# EAGLE board 5mmtermCuringCircuitOld (EAGLE 9.4.1)

Size 90.15 x 74.6 mm. Coordinates in mm from the lower left corner, seen from the top.
Outline: 0,0 90.15,0 90.15,74.6 0,74.6 0,0
Copper layers (1*16): Top 0.0178mm / dielectric 59mil / Bottom 0.0178mm
Design rules "epl-lpkf": minimum track width 8mil, minimum drill 0.35mm, track to track 8mil, track to pad 8mil, pad to pad 8mil, via to via 8mil, smd to smd 8mil, copper to edge 15mil, drill to drill 15mil, minimum pad ring 8mil, minimum via ring 8mil, stop-mask expansion 3mil, vias tented up to drill 0mil, thermal gap 10mil
Net classes: 0 default: width 0.508 mm, drill 1.199 mm, clearance 0.381 mm; 1 thick: width 1.27 mm, drill 1.199 mm, clearance 0.381 mm; 2 high current: width 4.318 mm, drill 1.199 mm, clearance 0.381 mm

## Footprints (pad centres in the part's own frame; a part is rotated, then mirrored left to right if it is on the bottom)
SPC4077 = drill 0.8 pad 2.184 long: 1 -3,0; 2 0,-4.8 | drill 1 pad 2.184 long: 3 3,0
C0805 = smd 1.3 x 1.5: 1 -0.95,0; 2 0.95,0
E1,8-4 = drill 0.711 pad 1.168: + -0.889,0 | drill 0.711 pad 1.168 octagon: - 0.889,0
SCREWTERMINAL-5MM-2 = drill 1.3 pad 2.032 square: 1 0,0 | drill 1.3 pad 2.032: 2 5,0
TO220H = drill 1.118 long: 1 -2.54,-10.16; 2 0,-10.16; 3 2.54,-10.16 | hole 3.302: 0,4.826
DIL16 = drill 0.813 long: 1 -8.89,-3.81; 2 -6.35,-3.81; 3 -3.81,-3.81; 4 -1.27,-3.81; 5 1.27,-3.81; 6 3.81,-3.81; 7 6.35,-3.81; 8 8.89,-3.81; 9 8.89,3.81; 10 6.35,3.81; 11 3.81,3.81; 12 1.27,3.81; 13 -1.27,3.81; 14 -3.81,3.81; 15 -6.35,3.81; 16 -8.89,3.81
1X08-BIG = drill 1.016 pad 1.778 octagon: 1 -8.89,0; 2 -6.35,0; 3 -3.81,0; 4 -1.27,0; 5 1.27,0; 6 3.81,0; 7 6.35,0; 8 8.89,0
R0805 = smd 1.3 x 1.5: 1 -0.95,0; 2 0.95,0
SCREWTERMINAL-5MM-3 = drill 1.3 pad 2.413 square: 1 0,0 | drill 1.3 pad 2.413: 2 5,0; 3 10,0
1X05 = drill 1.016 pad 1.88: 1 0,0; 2 2.54,0; 3 5.08,0; 4 7.62,0; 5 10.16,0
TRANS_RFP30N06LE = drill 1.32 square: 1 -2.54,0 | drill 1.32: 2 0,0; 3 2.54,0
1X16 = drill 1.016 pad 1.88: 1 0,0; 2 2.54,0; 3 5.08,0; 4 7.62,0; 5 10.16,0; 6 12.7,0; 7 15.24,0; 8 17.78,0; 9 20.32,0; 10 22.86,0; 11 25.4,0; 12 27.94,0; 13 30.48,0; 14 33.02,0; 15 35.56,0; 16 38.1,0

## Placement (x,y rotation side)
12V_BARREL  [SPC4077]  11.43,7.62 0 top
C1  0.1uF  [C0805]  63.5,17.78 0 top
C2  10uF  [E1,8-4]  71.12,45.72 0 top
C3  10uF  [E1,8-4]  63.5,45.72 180 top
DM_SWITCH  [SCREWTERMINAL-5MM-2]  73.66,68.58 180 top
FAN  [SCREWTERMINAL-5MM-2]  83.82,59.69 90 top
HEATER  [SCREWTERMINAL-5MM-2]  83.82,43.18 90 top
IC1  7805T  [TO220H]  52.07,22.86 180 top
IC2  L293D  [DIL16]  52.07,49.53 270 top
LIGHTS  [SPC4077]  78.74,8.89 180 top
MCP9808  [1X08-BIG]  29.21,7.62 0 top
MOTOR_A  [SCREWTERMINAL-5MM-2]  43.18,68.58 180 top
MOTOR_B  [SCREWTERMINAL-5MM-2]  58.42,68.58 180 top
POWER_SWITCH  [SCREWTERMINAL-5MM-2]  48.26,7.62 0 top
R1  10K  [R0805]  72.39,27.94 180 top
R2  10K  [R0805]  63.5,27.94 0 top
R3  220  [R0805]  72.39,38.1 0 top
R4  220  [R0805]  63.5,38.1 0 top
RELAY-A  [SCREWTERMINAL-5MM-3]  83.82,21.59 90 top
RELAY_B  [SCREWTERMINAL-5MM-2]  62.23,7.62 0 top
ROTARY_ENC  [1X05]  6.35,69.85 0 top
SPEAKER  [SCREWTERMINAL-5MM-2]  27.94,68.58 180 top
T1  RFP30N06LE  [TRANS_RFP30N06LE]  71.12,55.88 90 top
T2  RFP30N06LE  [TRANS_RFP30N06LE]  63.5,55.88 90 top
TFT_SCREEN  [1X16]  7.62,22.86 90 top

## Library data of the parts
12V_BARREL LIGHTS = con-jack; OC_FARNELL: unknown; OC_NEWARK: unknown
C1 = rcl
C2 C3 = rcl; SPICEPREFIX: C
DM_SWITCH FAN HEATER MOTOR_A MOTOR_B POWER_SWITCH RELAY_B SPEAKER = SparkFun-Connectors; SF_SKU: PRT-08432
IC1 = linear
IC2 = st-microelectronics; MPN: L293D; OC_FARNELL: 9589619; OC_NEWARK: 56P8249
MCP9808 = adafruit
R1-R4 = rcl; SPICEPREFIX: R
RELAY-A = SparkFun-Connectors; PROD_ID: CONN-10134; SF_SKU: PRT-08433
ROTARY_ENC TFT_SCREEN = SparkFun-Connectors
T1 T2 = RFP30N06LE; AVAILABILITY: Unavailable; MF: ON Semiconductor; MP: RFP30N06LE; PACKAGE: TO-220 Intersil; PRICE: None

## Nets
12V [thick]: C2.+ IC1.1 POWER_SWITCH.2 RELAY_B.2
GND: 12V_BARREL.1 C1.2 C2.- C3.- FAN.1 IC1.2 IC2.4 IC2.5 IC2.12 IC2.13 LIGHTS.1 MCP9808.2 R1.1 RELAY-A.3 ROTARY_ENC.1 SPEAKER.1 T1.3 T2.3 TFT_SCREEN.1 TFT_SCREEN.16
N$1: C1.1 C3.+ IC1.3 IC2.16 R3.2
N$2: IC2.1 IC2.9
N$3 [thick]: 12V_BARREL.3 POWER_SWITCH.1
N$4: HEATER.1 T2.2
N$5: R1.2 T2.1
N$6: R4.2 SPEAKER.2
N$7: DM_SWITCH.1 MCP9808.1 R2.2 ROTARY_ENC.2 TFT_SCREEN.15
N$8: DM_SWITCH.2 RELAY-A.1 T1.1
N$9: R2.1 T1.2
N$10: MCP9808.3
N$11: MCP9808.4
N$12: IC2.2
N$13: IC2.7
N$14: IC2.3 MOTOR_A.2
N$15: IC2.6 MOTOR_A.1
N$16: RELAY-A.2
N$17: R3.1 TFT_SCREEN.2
N$18: ROTARY_ENC.3
N$19: ROTARY_ENC.4
N$20: ROTARY_ENC.5
N$21: TFT_SCREEN.11
N$22: TFT_SCREEN.10
N$23: TFT_SCREEN.9
N$24: TFT_SCREEN.8
N$25: TFT_SCREEN.7
N$26: R4.1
N$27: IC2.14 MOTOR_B.1
N$28: IC2.11 MOTOR_B.2
N$29: IC2.15
N$30: IC2.10
RELAY_NO [thick]: FAN.2 HEATER.2 IC2.8 LIGHTS.3 RELAY_B.1

## Tracks (layer width: path | path; a pad name or v marks a point on that pad's centre or on a via)
12V  (3 unrouted)
GND  (19 unrouted)
N$1  (4 unrouted)
N$2  (1 unrouted)
N$3  (1 unrouted)
N$4  (1 unrouted)
N$5  (1 unrouted)
N$6  (1 unrouted)
N$7  (4 unrouted)
N$8  (2 unrouted)
N$9  (1 unrouted)
N$14  (1 unrouted)
N$15  (1 unrouted)
N$17  (1 unrouted)
N$27  (1 unrouted)
N$28  (1 unrouted)
RELAY_NO  (4 unrouted)